# EAGLE board Ocreeb MK 2 _faders half _pcb (EAGLE 9.7.0)
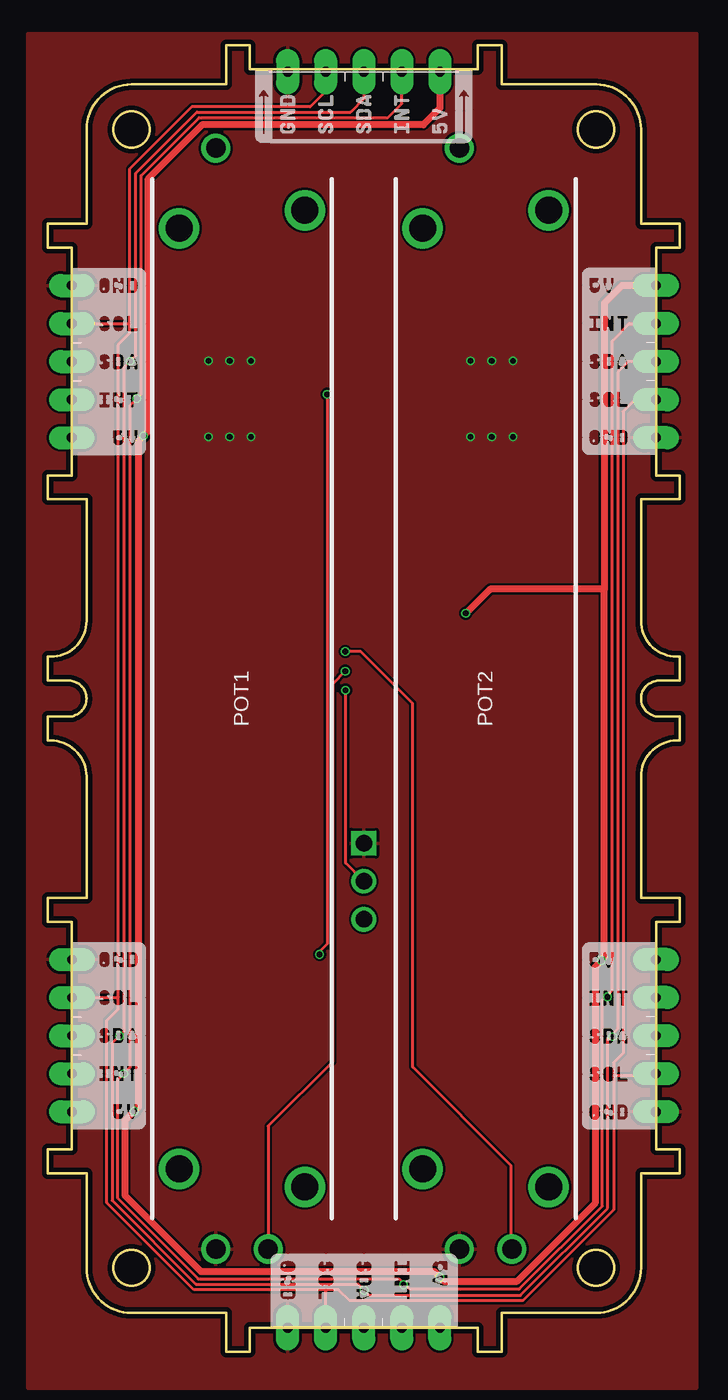
[diagram p0: board, top side]
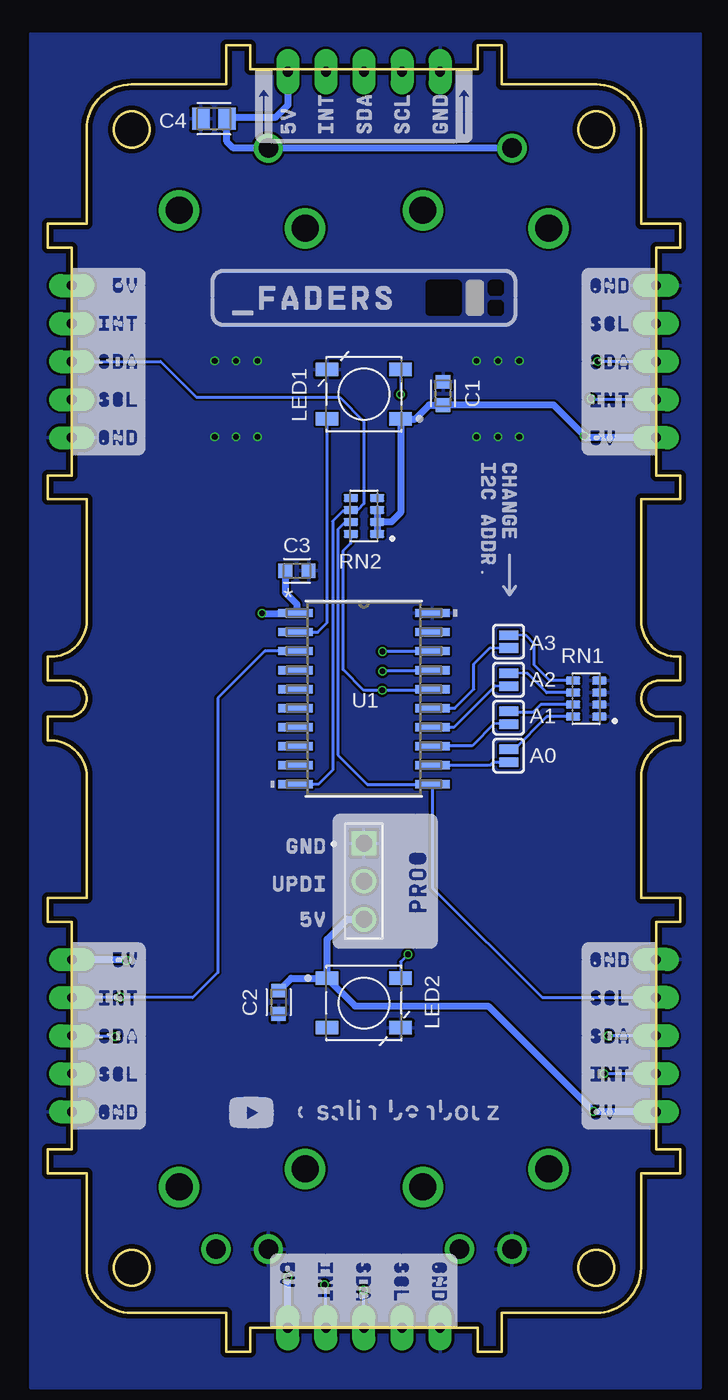
[diagram p1: board, bottom side, seen from below]

Size 42.2 x 87.2 mm. Coordinates in mm from the lower left corner, seen from the top.
Outline: 13.51,85.6 13.51,87.2 11.91,87.2 11.91,84.6 5.6,84.6 arc90 2.6,81.6 2.6,75.3 0,75.3 0,73.69 1.6,73.69 1.6,58.51 0,58.51 0,56.91 2.6,56.91 2.6,48.8 arc-90 0.2,46.4 0,46.4 0,44.8 1.4,44.8 arc-180 1.4,42.4 0,42.4 0,40.8 0.2,40.8 arc-90 2.6,38.4 2.6,30.3 0,30.3 0,28.7 1.6,28.7 1.6,13.51 0,13.51 0,11.91 2.6,11.91 2.6,5.6 arc90 5.6,2.6 11.91,2.6 11.91,0 13.51,0 13.51,1.6 28.7,1.6 28.7,0 30.3,0 30.3,2.6 36.6,2.6 arc90 39.6,5.6 39.6,11.91 42.2,11.91 42.2,13.51 40.6,13.51 40.6,28.7 42.2,28.7 42.2,30.3 39.6,30.3 39.6,38.4 arc-90 42,40.8 42.2,40.8 42.2,42.4 40.8,42.4 arc-180 40.8,44.8 42.2,44.8 42.2,46.4 42,46.4 arc-90 39.6,48.8 39.6,56.91 42.2,56.91 42.2,58.51 40.6,58.51 40.6,73.69 42.2,73.69 42.2,75.3 39.6,75.3 39.6,81.6 arc90 36.6,84.6 30.3,84.6 30.3,87.2 28.7,87.2 28.7,85.6 13.51,85.6
Outline: circle at 5.6,5.6 radius 1.2
Outline: circle at 36.6,5.6 radius 1.2
Outline: circle at 36.6,81.6 radius 1.2
Outline: circle at 5.6,81.6 radius 1.2
Copper layers (1*16): Top 0.035mm / dielectric 1.5mm / Bottom 0.035mm
Design rules "PCBWay_2L_152um-Track *": minimum track width 6mil, minimum drill 0.3mm, track to track 6mil, track to pad 6mil, pad to pad 6mil, via to via 6mil, smd to smd 0mil, copper to edge 0.3mm, drill to drill 10mil, minimum pad ring 6mil, minimum via ring 0.1mm, stop-mask expansion 2mil, vias tented up to drill 0.45mm, thermal gap 0.2mm
Net classes: 0 default: width 0.203 mm, drill 0.381 mm, clearance 0.152 mm; 1 power: width 0.457 mm, drill 0.381 mm, clearance 0.152 mm
bRestrict: area 14.6,69.2 to 16.9,71.5; area 13.2,69.2 to 14.2,71.5; area 11.8,70.6 to 12.8,71.5; area 11.8,69.2 to 12.8,70.1

## Footprints (pad centres in the part's own frame; a part is rotated, then mirrored left to right if it is on the bottom)
SMT-JUMPER_2_NC_PASTE_SILK = smd 0.635 x 1.27: 1 -0.432,0; 2 0.432,0
CAPC1608X85 = smd 0.921 x 0.97: 1 -0.775,0; 2 0.775,0
CAPC2012X110 = smd 1.165 x 1.465: 1 -0.875,0; 2 0.875,0
WS2812B = smd 1.5 x 0.9: 1 -2.45,1.65; 2 -2.45,-1.65; 3 2.45,-1.65; 4 2.45,1.65
PTA6043-2015DP-B103 = drill 1.3: 1 -36.75,1.75; 2 -36.75,-1.75; 3 36.75,1.75 | drill 1.8: S1 -31.4,4.2; S2 -32.6,-4.2; S3 31.4,4.2; S4 32.6,-4.2
61300311121 = drill 1.1 square: 1 -2.54,0 | drill 1.1: 2 0,0; 3 2.54,0
RESCAF80P320X160X60-8N = smd 0.97 x 0.53: 1 -0.875,1.2; 2 -0.875,0.4; 3 -0.875,-0.4; 4 -0.875,-1.2; 5 0.875,-1.2; 6 0.875,-0.4; 7 0.875,0.4; 8 0.875,1.2
SOIC20-W_MC_MCH-M = smd 2.286 x 0.559: 1 -4.572,5.715; 2 -4.572,4.445; 3 -4.572,3.175; 4 -4.572,1.905; 5 -4.572,0.635; 6 -4.572,-0.635; 7 -4.572,-1.905; 8 -4.572,-3.175; 9 -4.572,-4.445; 10 -4.572,-5.715; 11 4.572,-5.715; 12 4.572,-4.445; 13 4.572,-3.175; 14 4.572,-1.905; 15 4.572,-0.635; 16 4.572,0.635; 17 4.572,1.905; 18 4.572,3.175; 19 4.572,4.445; 20 4.572,5.715
5_POGO_EDGE = drill 0.65 pad 1.524 long: 1 -5.08,0; 2 -2.54,0; 3 0,0; 4 2.54,0; 5 5.08,0

## Placement (x,y rotation side)
A0  JUMPER-SMT_2_NC_PASTE_SILK  [SMT-JUMPER_2_NC_PASTE_SILK]  11.45,39.79 270 bottom
A1  JUMPER-SMT_2_NC_PASTE_SILK  [SMT-JUMPER_2_NC_PASTE_SILK]  11.45,42.33 270 bottom
A2  JUMPER-SMT_2_NC_PASTE_SILK  [SMT-JUMPER_2_NC_PASTE_SILK]  11.45,44.87 270 bottom
A3  JUMPER-SMT_2_NC_PASTE_SILK  [SMT-JUMPER_2_NC_PASTE_SILK]  11.45,47.41 270 bottom
C1  0.1uF  [CAPC1608X85]  15.82,63.97 270 bottom
C2  0.1uF  [CAPC1608X85]  26.79,23.33 90 bottom
C3  0.1uF  [CAPC1608X85]  25.57,52.13 180 bottom
C4  10uF  [CAPC2012X110]  31.11,82.31 0 bottom
LED1  WS2812B  [WS2812B]  21.1,63.92 180 bottom
LED2  WS2812B  [WS2812B]  21.1,23.28 0 bottom
POT1  PTA6043-2015DP-B103  [PTA6043-2015DP-B103]  12.97,43.6 90 top
POT2  PTA6043-2015DP-B103  [PTA6043-2015DP-B103]  29.23,43.6 90 top
PROG  61300311121  [61300311121]  21.1,31.41 270 bottom
RN1  CAY16-103J4LF  [RESCAF80P320X160X60-8N]  6.27,43.6 180 bottom
RN2  CAY16-103J4LF  [RESCAF80P320X160X60-8N]  21.1,55.79 180 bottom
U1  ATTINY816-SNRSOIC20-W_MC_MCH-M  [SOIC20-W_MC_MCH-M]  21.1,43.6 0 bottom
U$1  5PIN_EDGE5_POGO_EDGE_OUT_  [5_POGO_EDGE]  21.1,85.45 0 top
U$2  5PIN_EDGE  [5_POGO_EDGE]  1.61,66.1 90 top
U$3  5PIN_EDGE  [5_POGO_EDGE]  40.6,66.1 270 top
U$4  5PIN_EDGE  [5_POGO_EDGE]  21.1,1.6 180 top
U$5  5PIN_EDGE  [5_POGO_EDGE]  40.59,21.1 270 top
U$6  5PIN_EDGE  [5_POGO_EDGE]  1.62,21.1 90 top

## Library data of the parts
A0 A1-A3 = SparkFun-Jumpers
C1-C4 = Capacitor; CATEGORY: Capacitor
LED1 LED2 = WS2812B; CATEGORY: LED; COLOR: RGB; DESCRIPTION: LED integrated light source; MANUFACTURER: Worldsemi; MPN: WS2812B; OPERATING_TEMP: -25 ℃ to +80℃(TJ); PART_STATUS: Active; SUB_CATEGORY: RGB
POT1 POT2 = PTA6043-2015DP-B103; AVAILABILITY: In Stock; CHECK_PRICES: https://www.snapeda.com/parts/PTA6043-2015DPB103/Bourns/view-part/?ref=eda; DESCRIPTION: PTA Series, Linear Potentiometer, 10kOhms, +/-20%, 0.25W, Through Hole | Bourns PTA6043-2015DPB103; MF: Bourns; MP: PTA6043-2015DPB103; PACKAGE: None; PRICE: None; PURCHASE-URL: https://www.snapeda.com/api/url_track_click_mouser/?unipart_id=584779&manufacturer=Bourns&part_name=PTA6043-2015DPB103&search_term=pta6043-2015dpb103; SNAPEDA_LINK: https://www.snapeda.com/parts/PTA6043-2015DPB103/Bourns/view-part/?ref=snap
PROG = Headers; CREATED_BY: PCBLayout.com; DIGI_KEY_PART_NUMBER: 732-5316-ND; MANUFACTURER: Wurth Electronics Inc.; MPN: 61300311121
RN1 RN2 = CAY16-103J4LF; CHECK_PRICES: https://www.snapeda.com/parts/CAY16-103J4LF/Bourns+-+J.W.+Miller/view-part/?ref=eda; DESCRIPTION: Resistor, Chip Array,10 Kilohms,62 mW,+ 5%,50 V (Max.) | Bourns CAY16-103J4LF; DIGIKEY_PART_NUMBER: CAY16-103J4LFTR-ND; MF: Bourns; MP: CAY16-103J4LF; PACKAGE: 1206 Bourns; PURCHASE-URL: https://www.snapeda.com/api/url_track_click_mouser/?unipart_id=47136&manufacturer=Bourns&part_name=CAY16-103J4LF&search_term=None; SNAPEDA_LINK: https://www.snapeda.com/parts/CAY16-103J4LF/Bourns+-+J.W.+Miller/view-part/?ref=snap
U1 = Attiny816; COPYRIGHT: Copyright (C) 2023 Ultra Librarian. All rights reserved.; DIGI-KEY_PART_NUMBER_1: ATTINY816-SNRCT-ND; DIGI-KEY_PART_NUMBER_2: ATTINY816-SNRDKR-ND; DIGI-KEY_PART_NUMBER_3: ATTINY816-SNRTR-ND; MANUFACTURER_PART_NUMBER: ATTINY816-SNR; MFR_NAME: Microchip
U$1-U$6 = OCREEB_POGO_CON

## Nets
5V [power]: C1.2 C2.2 C3.2 C4.2 LED1.1 LED2.1 POT1.3 POT2.3 PROG.3 RN2.1 RN2.2 RN2.3 U1.1 U$1.5 U$2.1 U$3.1 U$4.1 U$5.1 U$6.1
ADDR0: A0.1 RN1.8
ADDR1: A1.1 RN1.7
ADDR2: A2.1 RN1.6
ADDR3: A3.1 RN1.5
GND [power]: C1.1 C2.1 C3.1 C4.1 LED1.3 LED2.3 POT1.1 POT2.1 PROG.1 RN1.1 RN1.2 RN1.3 RN1.4 U1.20 U$1.1 U$2.5 U$3.5 U$4.5 U$5.5 U$6.5
INTR: U1.3 U$1.4 U$2.2 U$3.2 U$4.2 U$5.2 U$6.2
N$1: LED1.2 LED2.4
N$2: A3.2 U1.15
N$4: A2.2 U1.14
N$5: A1.2 U1.13
N$6: A0.2 U1.12
PIXEL: LED1.4 U1.2
POT1: POT1.2 U1.17
POT2: POT2.2 U1.18
SCL: RN2.7 U1.11 U$1.2 U$2.4 U$3.4 U$4.4 U$5.4 U$6.4
SDA: RN2.6 U1.10 U$1.3 U$2.3 U$3.3 U$4.3 U$5.3 U$6.3
UPDI: PROG.2 RN2.8 U1.16

## Tracks (layer width: path | path; a pad name or v marks a point on that pad's centre or on a via)
5V  (via drill 0.38)
  Top 0.457: U$1.5 26.18,83.02 25.07,81.91 10.31,81.91 6.72,78.32 6.72,61.47 v6.4,61.15 6.08,60.82 6.08,16.35 v5.78,16.05 5.15,15.42 5.15,10.45 10.25,5.35 25.83,5.35 v26.18,4.99 26.48,4.69 31.29,4.69 36.53,9.93 36.53,25.69 v36.97,26.12 36.97,26.14 37.15,26.33 37.15,50.91 | 37.15,50.91 37.15,70.02 38.32,71.18 U$3.1 | 37.15,50.91 29.53,50.91 v27.91,49.29
  Bottom 0.457: U$5.1 36.8,26.18 36.86,26.12 v36.97,26.12 | RN2.3 RN2.2 | RN2.2 RN2.1 | RN2.2 19.27,55.39 18.65,56.01 LED1.1 17.67,62.27 16.74,63.2 C1.2 8.45,63.2 v6.4,61.15 6.27,61.02 U$2.1 | LED2.1 23.55,27.54 22.22,28.87 PROG.3 | v27.91,49.29 25.7,49.29 U1.1 25.57,49.42 25.57,49.9 26.35,50.67 C3.2 | U$4.1 v26.18,4.99 | U$6.1 5.75,16.02 v5.78,16.05 12.81,23.08 21.7,23.08 LED2.1 | POT1.3 POT2.3 29.81,80.35 30.24,80.79 30.24,82.3 C4.2 30.13,82.41 26.99,82.41 26.18,83.22 U$1.5 | C2.2 25.97,24.93 LED2.1
ADDR0
  Bottom 0.203: RN1.8 8.89,42.4 11.14,40.15 11.4,40.15 A0.1
ADDR1
  Bottom 0.203: RN1.7 9.31,43.2 9.82,42.69 11.4,42.69 A1.1
ADDR2
  Bottom 0.203: RN1.6 8.9,44 10.18,45.28 A2.1
ADDR3
  Bottom 0.203: RN1.5 8.69,44.8 9.72,45.84 9.72,47.26 10.28,47.82 A3.1
GND  (via drill 0.38)
  other vias: 28.21,61.08 29.63,61.08 31.06,61.08 10.74,61.08 12.16,61.08 13.58,61.08 10.74,66.16 13.58,66.16 12.16,66.16 29.63,66.16 28.21,66.16 31.06,66.16
  pour Bottom: -1.35,-2.42 43.35,-2.42 43.35,88 -1.35,88
  pour Top: -1.35,-2.42 43.35,-2.42 43.35,88 -1.35,88
INTR  (via drill 0.38)
  Top 0.203: U$1.4 23.64,83.33 22.71,82.39 10.11,82.39 6.24,78.52 6.24,63.92 v5.95,63.63 5.53,63.21 5.53,19.01 v5.09,18.57 4.67,18.15 4.67,10.25 10.05,4.86 23.46,4.86 23.74,4.59 | 37.22,23.69 37.67,24.14 37.67,67.48 38.83,68.64 U$3.2 | 37.22,23.69 37.01,23.48 37.01,9.73 31.48,4.19 24.14,4.19 23.74,4.59 | 37.22,23.69 v37.36,23.69 | 23.74,4.59 v23.74,4.47
  Bottom 0.203: 37.18,23.64 U$5.2 | U1.3 27.7,46.77 30.85,43.62 30.85,25.31 32.53,23.64 37.18,23.64 | v37.36,23.69 37.23,23.69 37.18,23.64 | U$4.2 23.64,4.48 23.72,4.48 v23.74,4.47 | U$6.2 5.08,18.56 v5.09,18.57 | U$2.2 5.88,63.56 v5.95,63.63
N$1  (via drill 0.38)
  Top 0.203: v18.66,63.92 18.66,27.24 18.15,26.73 v18.15,26.53
  Bottom 0.203: LED1.2 18.65,63.93 v18.66,63.92 | v18.15,26.53 18.65,26.04 LED2.4
N$2
  Bottom 0.203: U1.15 15.03,42.97 13.76,44.23 13.76,45.9 12.66,47 A3.2
N$4
  Bottom 0.203: U1.14 15.08,41.7 12.31,44.46 A2.2
N$5
  Bottom 0.203: A1.2 12.41,41.92 13.89,40.45 16.5,40.45 U1.13
N$6
  Bottom 0.203: U1.12 12.67,39.16 12.46,39.36 11.47,39.36 A0.2
PIXEL
  Bottom 0.203: LED1.4 23.55,48.67 24.17,48.05 U1.2
POT1  (via drill 0.38)
  Top 0.203: v19.87,45.43 19.02,44.58 19.02,19.37 14.72,15.07 POT1.2
  Bottom 0.203: U1.17 16.6,45.43 v19.87,45.43
POT2  (via drill 0.38)
  Top 0.203: v19.87,46.75 20.88,46.75 24.35,43.28 24.35,19.01 30.9,12.46 30.9,6.93 POT2.2
  Bottom 0.203: v19.87,46.75 19.84,46.77 U1.18
SCL
  Top 0.203: U$3.4 39.21,63.56 38.41,62.76 38.41,19.94 37.78,19.3 37.78,18.4 | 4.72,23.69 4.72,67.23 5.49,68.01 5.49,68.59 | 4.72,23.69 4.72,22.87 3.96,22.11 3.96,9.95 9.76,4.15 18.66,4.15 | 5.49,68.59 5.49,78.98 9.61,83.1 17.53,83.1 18.56,84.14 U$1.2 | U$5.4 40.43,18.4 37.78,18.4 | 37.78,18.4 37.78,9.48 31.7,3.41 20.15,3.41 19.41,4.15 18.66,4.15 | U$4.4 18.56,4.05 18.66,4.15 | U$6.4 4.67,23.64 4.72,23.69 | U$2.4 5.45,68.64 5.49,68.59
  Bottom 0.203: RN2.7 22,55.42 22.32,55.42 22.84,54.9 22.84,39.85 20.87,37.89 U1.11 16.53,30.98 9.19,23.64 U$6.4
SDA  (via drill 0.38)
  Top 0.203: U$3.3 38.75,66.1 38.05,65.41 38.05,21.56 37.54,21.05 | 37.54,21.05 37.37,20.87 37.37,9.58 31.56,3.77 21.47,3.77 v21.13,4.11 | 37.54,21.05 v37.71,21.05 | v21.13,4.11 | v21.13,4.11 20.73,4.51 9.9,4.51 4.31,10.1 4.31,20.6 v4.8,21.09 5.12,21.42 5.12,65.72 v5.5,66.1 5.89,66.48 5.89,78.67 9.96,82.75 20.22,82.75 21.1,83.63 U$1.3
  Bottom 0.203: U$5.3 37.6,21.1 37.65,21.05 v37.71,21.05 | U1.10 24.14,37.89 23.19,38.84 23.19,55.45 22.53,56.11 22.05,56.11 RN2.6 21.51,56.19 21.1,56.61 21.1,62.09 22.73,63.72 32.28,63.72 34.66,66.1 U$3.3 | U$4.3 21.1,4.08 v21.13,4.11 | U$6.3 v4.79,21.1 v4.8,21.09 | U$2.3 v5.5,66.1
UPDI  (via drill 0.38)
  Top 0.203: PROG.2 19.88,32.63 v19.88,44.16
  Bottom 0.203: U1.16 16.6,44.16 v19.88,44.16 21.11,44.16 22.48,45.53 22.48,53.47 21.98,53.98 RN2.8